# Altium PCB PCB1.PcbDoc
Units mm, origin at the board's own origin, x right, y up, seen from the top; angles counter-clockwise.
Board outline 36 x 36 mm, 2 copper layers (Top Layer, Bottom Layer); 19 components, 84 nets, 192 pads, 9 vias.
Unrouted connection lines stored in the file: 73.
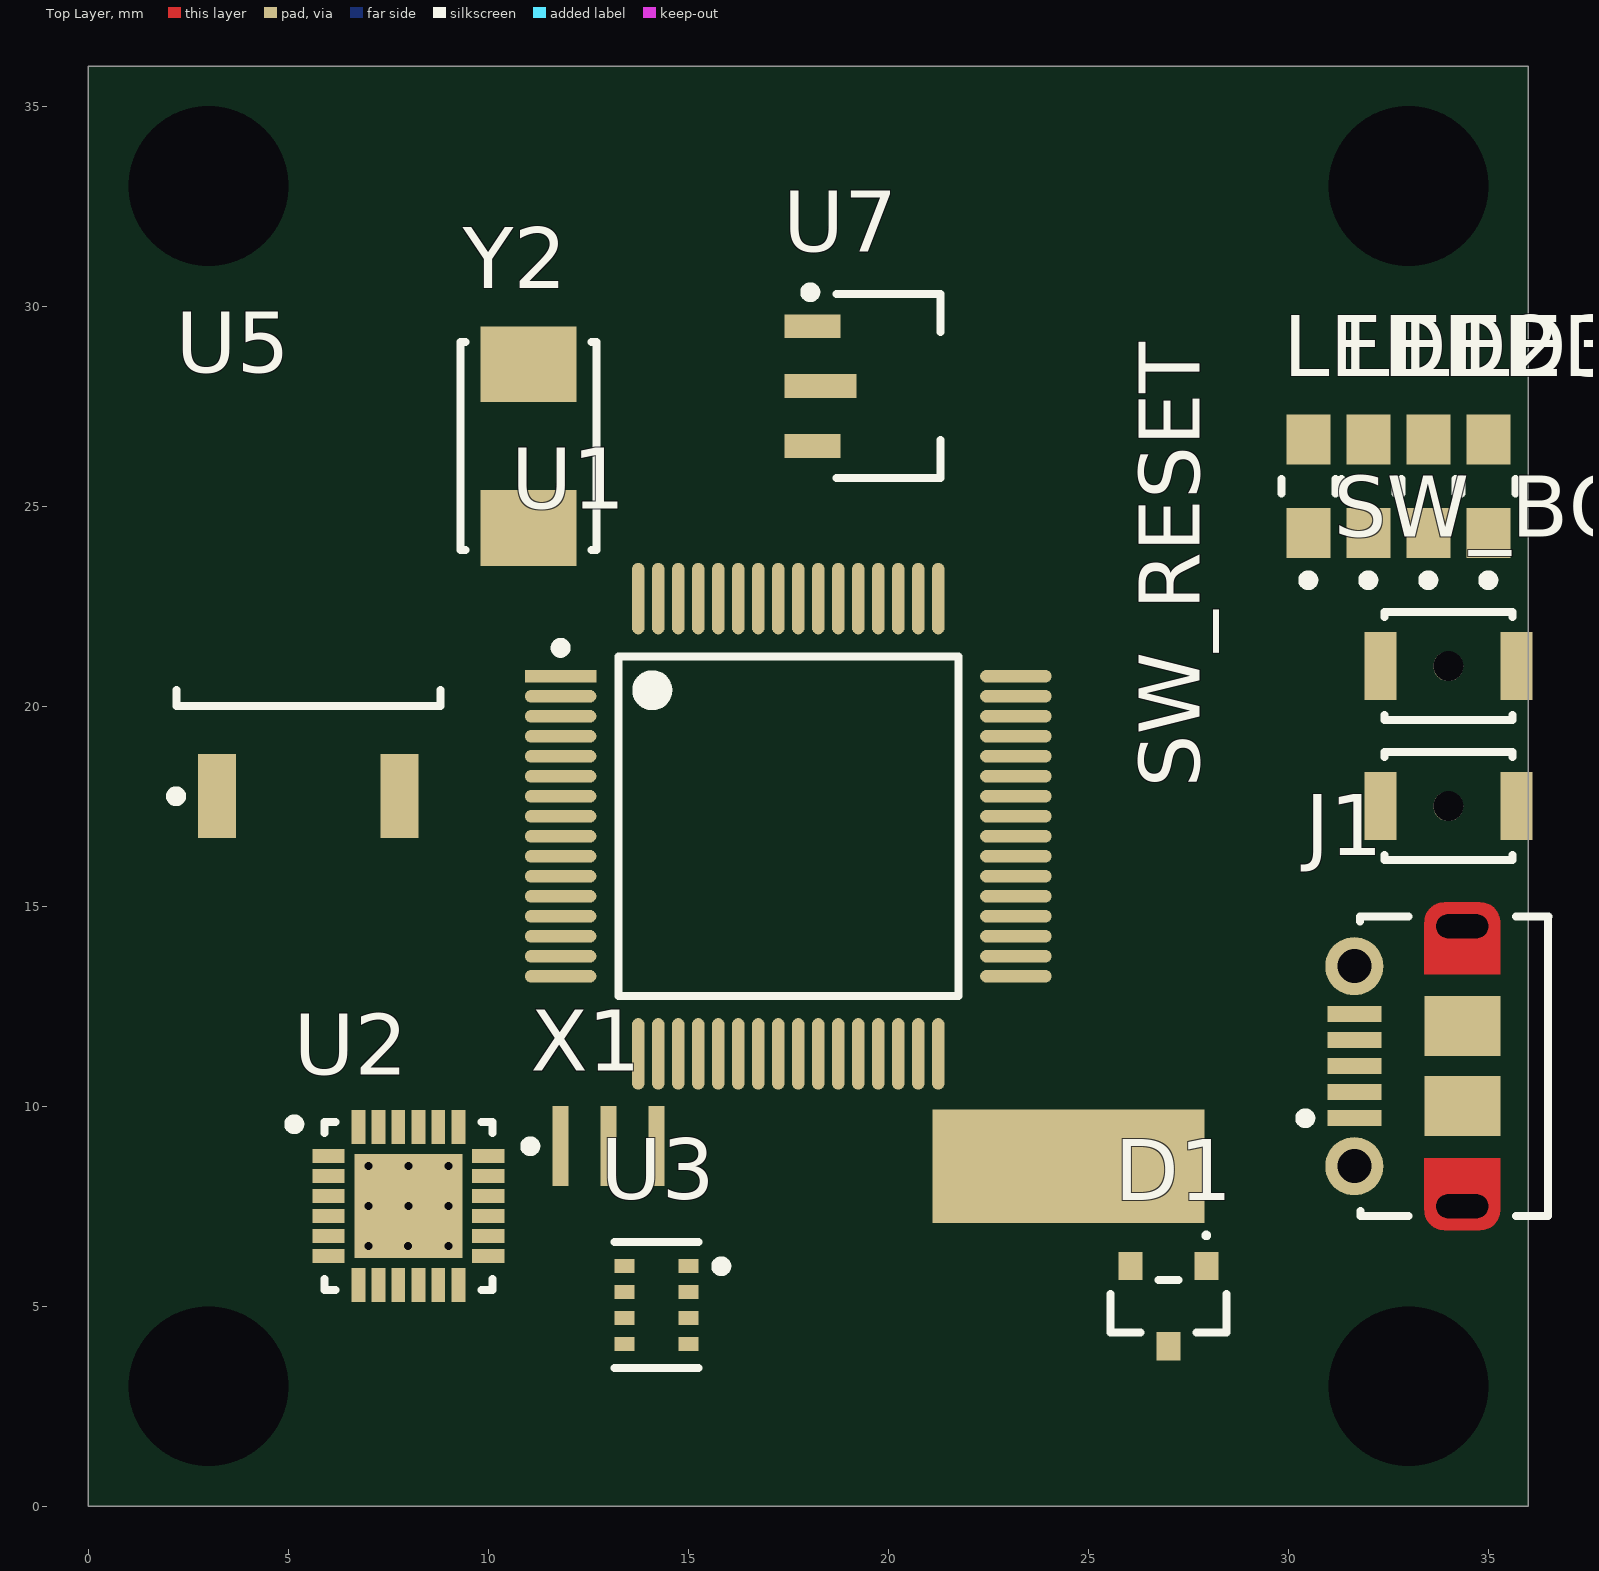
[diagram p0: Top Layer view]
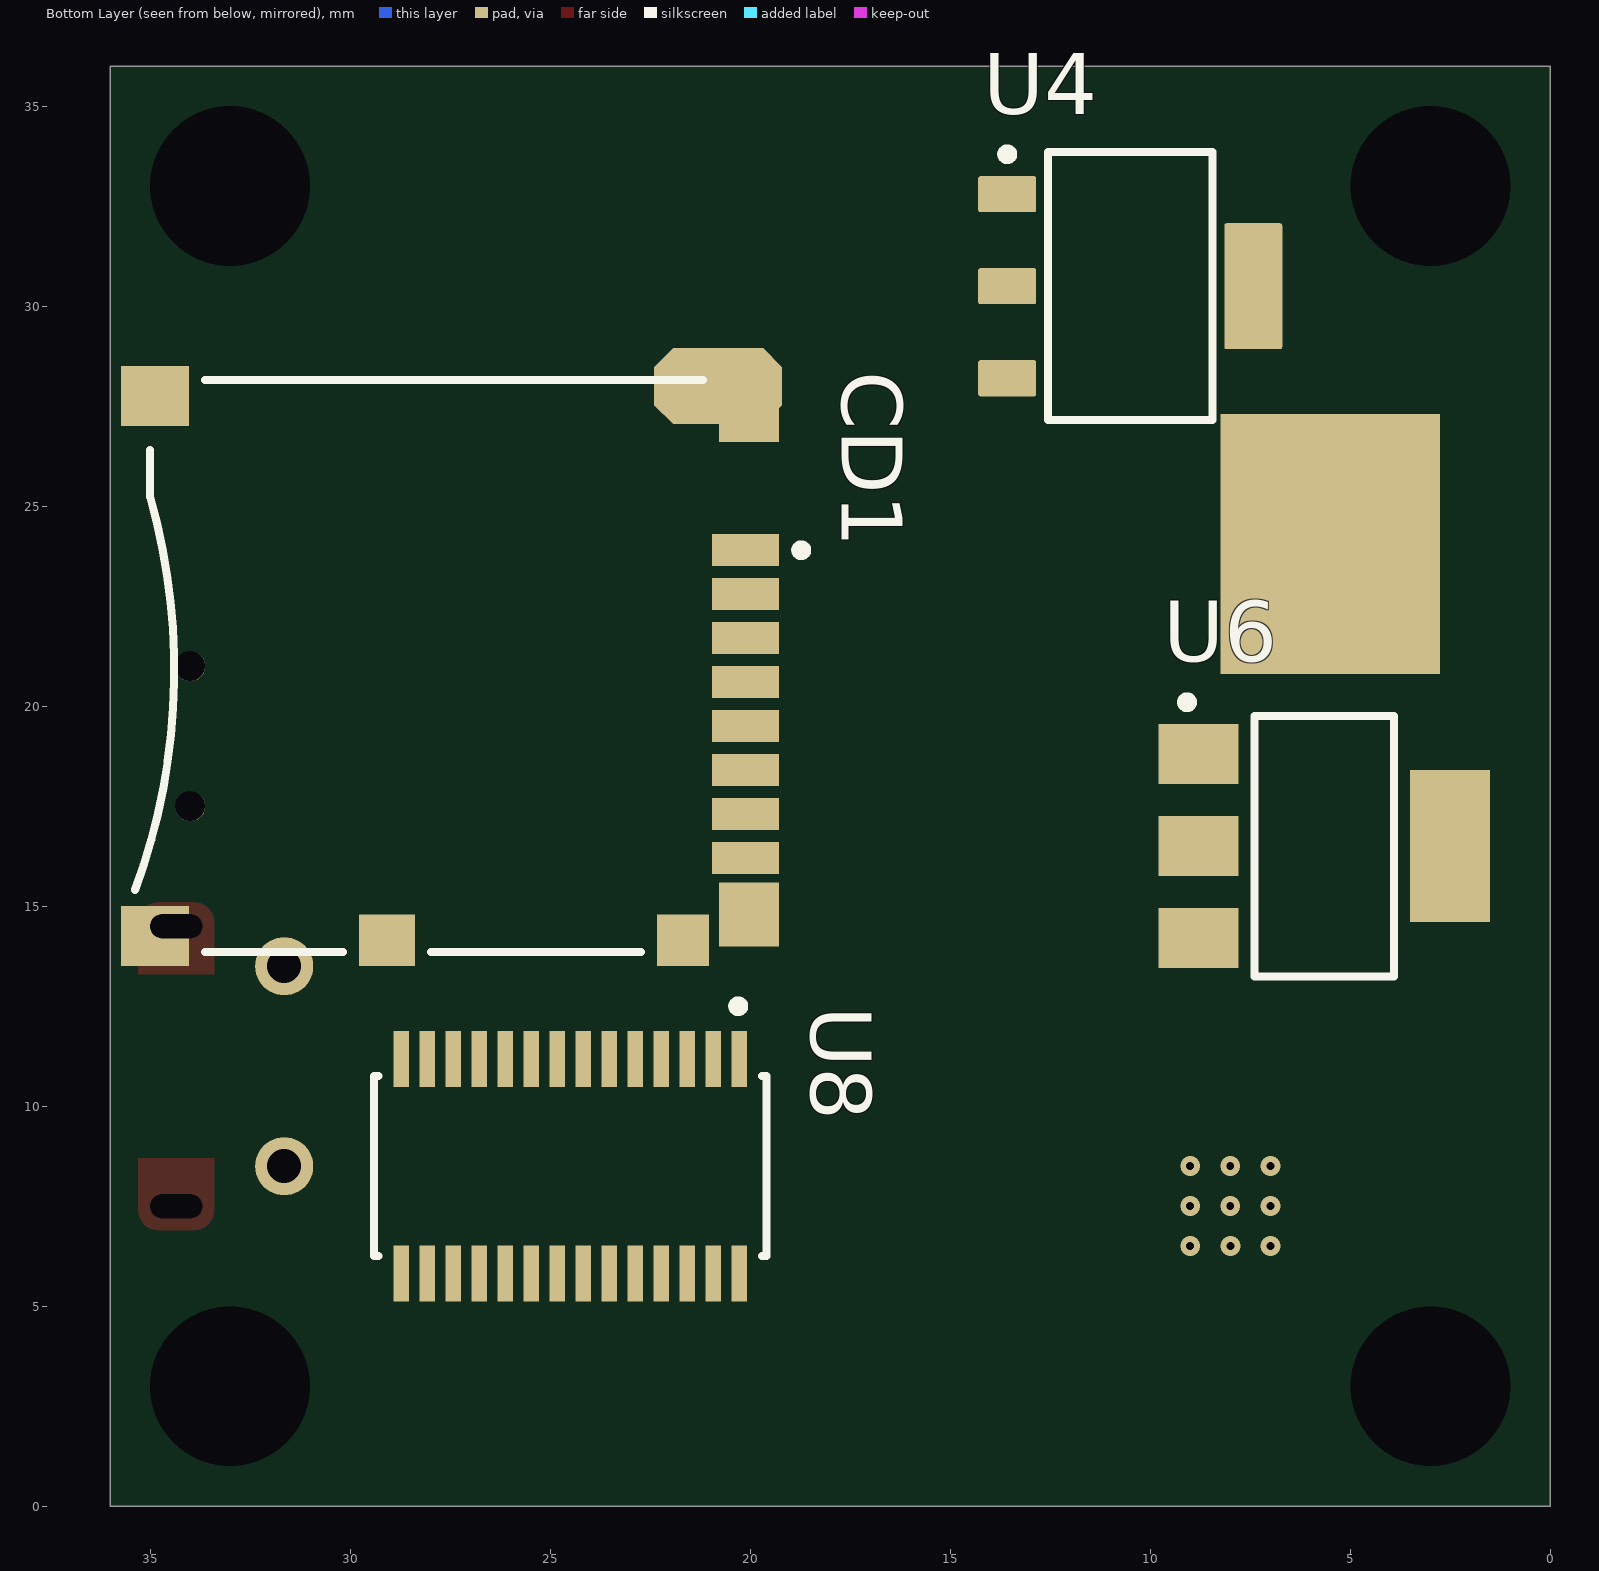
[diagram p1: Bottom Layer view, seen from below]

## Layer stack, top to bottom
Top Solder: solder mask 0.0102, Solder Resist, Dk 3.5
Top Layer: signal copper 0.0356
Dielectric 1: dielectric 0.32, FR-4, Dk 4.8
Bottom Layer: signal copper 0.0356
Bottom Solder: solder mask 0.0102, Solder Resist, Dk 3.5

## Board outline
0,0 36,0 36,36 0,36

## Design rules (kind name [scope] priority, off if disabled: settings)
Clearance [All] p1: gap=0.254 ignorepadtopadclearanceinfootprint=FALSE except(0: Arc-Hole Track-Hole SMDPad-Hole THPad-Hole Via-Hole Fill-Hole Poly-Hole Region-Hole Text-Hole)
PolygonConnect [All] p1: connectstyle=Relief reliefconductorwidth=0.254 reliefentries=4 polygonreliefangle="90 Angle" airgapwidth=0.254
RoutingVias [All] p1: holewidth=0.711 width=1.27 viastyle="Through Hole" minholewidth=0.711 minwidth=1.27 maxholewidth=0.711 maxwidth=1.27
SolderMaskExpansion [All] p1: expansion=0.102 istentingtop=FALSE
Width [All] p1: maxlimit=0.254 minlimit=0.254 preferedwidth=0.254
30 further rules are at their usual default settings.

## Components (designator, comment, footprint, x,y, rotation, side; value= is the part's Value field where it differs from the comment)
CD1 "502774-0891" MOLX-502774-0891_V 27.5,21 r270 bottom
D1 "BAT54C" NXP-SOT23-3_V 27,5 r0 top
J1 "105017-0001" USB-MICRO-B_V 33,11 r90 top
LED1 "SML-210MTT86" FP-SML-210-MFG 30.5,25.5 r90 top
LED2 "SML-210MTT86" FP-SML-210-MFG 32,25.5 r90 top
LED3 "SML-210MTT86" FP-SML-210-MFG 33.5,25.5 r90 top
LED4 "SML-210MTT86" FP-SML-210-MFG 35,25.5 r90 top
SW_BOOT "B3U-1000P-B" FP-B3U-1000P-B-MFG 34,17.5 r0 top
SW_RESET "B3U-1000P-B" FP-B3U-1000P-B-MFG 34,21 r180 top
U1 "STM32F722RET6" FP-LQFP64-5W-IPC_A 17.5,17 r0 top
U2 "MPU-6000" INSE-QFN-24_V 8,7.5 r0 top
U3 "BMP280" FP-BMP280-MFG 14.2,5.025 r0 top
U4 "LM2940IMP-9.0/NOPB" DCY0004A_L 10.5,30.5 r180 bottom
U5 "LD1117DT50TR" TO-252_N 5.5,22 r90 top
U6 "NCP1117ST33T3G" ONSC-SOT-223-4-318H-01_A_V 5.65,16.5 r180 bottom
U7 "L78L05ABUTR" SOT-89_N 20,28 r0 top
U8 "MAX7456EUI+T" FP-U28E-5-MFG 24.5,8.5 r270 bottom
X1 "CSTCE8M00G55-R0" MURA-CSTCE_G_A-3_V 13,9 r0 top
Y2 "ABM3-27.000MHZ-D2Y-T" FP-ABM3-MFG 11,26.5 r90 top

## Footprints (in the part's own frame and the unit in brackets; to place one, negate y for a bottom-side part, rotate by r counter-clockwise, add the part's x,y. Pads: shape width x height; smd on the part's side, far side on the other; paste and mask are expansions set on the pad)
DCY0004A_L [mm] "SOT223, 4-Leads, Body 6.7x3.7mm, Pitch 2.3mm, IPC High Density"
  rrect11% 1.45x0.9 smd: 1(-3.075,2.3) 2(-3.075,0) 3(-3.075,-2.3)
  rrect7% 1.45x3.15 smd: 4(3.075,0)
  silkscreen extent -3.2,-3.35 2.05,3.42, body extent -3.5,-3.25 3.5,3.25, height 1.62
FP-ABM3-MFG [mm]
  rect 1.9x2.4 smd paste+0 mask+0: 1(-2.05,0) 2(2.05,0)
  silkscreen extent -2.6,-1.7 2.6,1.7, body extent -3.1,-1.8 3.1,1.8, height 0.25
FP-B3U-1000P-B-MFG [mm]
  rect 0.8x1.7 smd paste+0 mask+0: 1(-1.7,0) 2(1.7,0)
  round 0.75 hole 0.75 unplated paste-1000 mask+0: ""(0,0)
  silkscreen extent -1.6,-1.35 1.6,1.35, body extent -2.2,-1.45 2.2,1.45, height 0.25
FP-BMP280-MFG [mm]
  rect 0.5x0.35 smd paste+0 mask+0: 1(0.8,0.975) 2(0.8,0.325) 3(0.8,-0.325) 4(0.8,-0.975) 5(-0.8,-0.975) 6(-0.8,-0.325) 7(-0.8,0.325) 8(-0.8,0.975)
  silkscreen extent -1.05,-1.58 1.75,1.58, body extent -1.55,-1.8 1.55,1.8, height 0.25
FP-LQFP64-5W-IPC_A [mm]
  rect 1.788x0.312 smd paste+0 mask+0: 1(-5.691,3.75)
  rrect100% 1.788x0.312 smd paste+0 mask+0: 2(-5.691,3.25) 3(-5.691,2.75) 4(-5.691,2.25) 5(-5.691,1.75) 6(-5.691,1.25) 7(-5.691,0.75) 8(-5.691,0.25) 9(-5.691,-0.25) 10(-5.691,-0.75) 11(-5.691,-1.25) 12(-5.691,-1.75) 13(-5.691,-2.25) 14(-5.691,-2.75) 15(-5.691,-3.25) 16(-5.691,-3.75) 33(5.691,-3.75) 34(5.691,-3.25) 35(5.691,-2.75) 36(5.691,-2.25) 37(5.691,-1.75) 38(5.691,-1.25) 39(5.691,-0.75) 40(5.691,-0.25) 41(5.691,0.25) 42(5.691,0.75) 43(5.691,1.25) 44(5.691,1.75) 45(5.691,2.25) 46(5.691,2.75) 47(5.691,3.25) 48(5.691,3.75)
  rrect100% 0.312x1.788 smd paste+0 mask+0: 17(-3.75,-5.691) 18(-3.25,-5.691) 19(-2.75,-5.691) 20(-2.25,-5.691) 21(-1.75,-5.691) 22(-1.25,-5.691) 23(-0.75,-5.691) 24(-0.25,-5.691) 25(0.25,-5.691) 26(0.75,-5.691) 27(1.25,-5.691) 28(1.75,-5.691) 29(2.25,-5.691) 30(2.75,-5.691) 31(3.25,-5.691) 32(3.75,-5.691) 49(3.75,5.691) 50(3.25,5.691) 51(2.75,5.691) 52(2.25,5.691) 53(1.75,5.691) 54(1.25,5.691) 55(0.75,5.691) 56(0.25,5.691) 57(-0.25,5.691) 58(-0.75,5.691) 59(-1.25,5.691) 60(-1.75,5.691) 61(-2.25,5.691) 62(-2.75,5.691) 63(-3.25,5.691) 64(-3.75,5.691)
  silkscreen extent -5.82,-4.25 4.25,4.58, body extent -7.09,-7.09 7.09,7.09, height 0.25
FP-SML-210-MFG [mm]
  rect 1.25x1.1 smd paste+0 mask+0: 1(-1.175,0) 2(1.175,0)
  silkscreen extent -2.47,-0.67 0.18,0.67, body extent -1.9,-0.77 1.9,0.77, height 0.25
FP-U28E-5-MFG [mm]
  rect 1.4x0.38 smd paste+0 mask+0: 1(-2.68,4.225) 2(-2.68,3.575) 3(-2.68,2.925) 4(-2.68,2.275) 5(-2.68,1.625) 6(-2.68,0.975) 7(-2.68,0.325) 8(-2.68,-0.325) 9(-2.68,-0.975) 10(-2.68,-1.625) 11(-2.68,-2.275) 12(-2.68,-2.925) 13(-2.68,-3.575) 14(-2.68,-4.225) 15(2.68,-4.225) 16(2.68,-3.575) 17(2.68,-2.925) 18(2.68,-2.275) 19(2.68,-1.625) 20(2.68,-0.975) 21(2.68,-0.325) 22(2.68,0.325) 23(2.68,0.975) 24(2.68,1.625) 25(2.68,2.275) 26(2.68,2.925) 27(2.68,3.575) 28(2.68,4.225)
  rect 2.84x6.8 smd far side paste+0 mask+0: 29(0,0)
  silkscreen extent -4.12,-4.9 2.25,4.9, body extent -3.2,-4.85 3.2,4.85, height 1.1
INSE-QFN-24_V [mm] "QFN, 24-Leads, Body 4.00x4.00mm, Pitch 0.50mm, Thermal Pad 2.7x2.6mm"
  rect 0.8x0.35 smd: 1(-2,1.25) 2(-2,0.75) 3(-2,0.25) 4(-2,-0.25) 5(-2,-0.75) 6(-2,-1.25) 13(2,-1.25) 14(2,-0.75) 15(2,-0.25) 16(2,0.25) 17(2,0.75) 18(2,1.25)
  rect 0.35x0.85 smd: 7(-1.25,-1.975) 8(-0.75,-1.975) 9(-0.25,-1.975) 10(0.25,-1.975) 11(0.75,-1.975) 12(1.25,-1.975) 19(1.25,1.975) 20(0.75,1.975) 21(0.25,1.975) 22(-0.25,1.975) 23(-0.75,1.975) 24(-1.25,1.975)
  rect 2.7x2.6 smd: 25(0,0)
  silkscreen extent -2.97,-2.1 2.1,2.17, body extent -2,-2 2,2, height 0.95
MOLX-502774-0891_V [mm] "SMD, 14-Leads, Body 15x14.3mm, Pitch 1.1mm"
  rect 0.8x1.68 smd: 1(-2.9,7.385) 2(-1.8,7.385) 3(-0.7,7.385) 4(0.4,7.385) 5(1.5,7.385) 6(2.6,7.385) 7(3.7,7.385) 8(4.8,7.385)
  rect 1.29x1.3 smd: 9(6.855,5.825)
  rect 1.29x1.4 smd: 10(6.855,-1.575)
  rect 1.5x1.7 smd: 11(6.75,-7.375) 12(-6.75,-7.375)
  rect 1.7x1.5 smd: 13(-6.45,7.475)
  rect 1.6x1.5 smd: 14(6.21,7.475)
  silkscreen extent -7.15,-7.88 7.15,8.9, body extent -7.15,-8 7.15,8, height 1.78
MURA-CSTCE_G_A-3_V [mm] "SMD, 3-Leads, Body 3.2x1.3mm, Pitch 1.2mm"
  rect 0.4x2 smd: 1(-1.2,0) 2(0,0) 3(1.2,0)
  silkscreen extent -2.07,-0.12 -1.83,0.12, body extent -1.6,-0.65 1.6,0.65, height 0.7
NXP-SOT23-3_V [mm] "SOT23, 3-Leads, Body 1.3x2.9mm, Pitch 0.95mm"
  rect 0.6x0.7 smd paste-0.05: 1(0.95,1) 2(-0.95,1) 3(0,-1)
  silkscreen extent -1.45,-0.65 1.45,1.79, body extent -1.45,-0.65 1.45,0.65, height 1.1
ONSC-SOT-223-4-318H-01_A_V [mm] "SOT223, 4-Leads, Body 6.5x3.5mm, Pitch 2.3mm"
  rect 2x1.5 smd: 1(-3.15,2.3) 2(-3.15,0) 3(-3.15,-2.3)
  rect 2x3.8 smd: 4(3.15,0)
  silkscreen extent -3.55,-3.25 1.75,3.72, body extent -1.75,-3.25 1.75,3.25, height 1.8
SOT-89_N [mm] "SOT89, 3-Leads, Body 4.5x2.4 mm, Pitch 1.5mm, Lead Span 4.1mm, IPC Medium Density"
  rect 1.4x0.6 smd: 1(-1.9,1.5) 3(-1.9,-1.5)
  rect 1.8x0.6 smd: 2(-1.7,0)
  oct 3.2x1.9 smd far side: 2(0.8,0)
  silkscreen extent -2.07,-2.3 1.3,2.47, body extent -1.3,-2.3 1.3,2.3, height 1.6
TO-252_N [mm] "D-PAK, 4-Leads, Body 6.1x6.5mm, Pitch 2.28mm, Lead Span 9.7mm, IPC Medium Density"
  rect 2.1x0.95 smd: 1(-4.25,2.28) 3(-4.25,-2.28)
  rect 6.5x5.5 smd far side: 4(2.05,0)
  silkscreen extent -4.37,-3.3 -1.6,3.43, body extent -2,-3.3 4.2,3.3, height 2.4
USB-MICRO-B_V [mm] "USB, MICRO B, Body 7.491x4.695 mm, Pitch 0.65 mm"
  rect 0.4x1.35 smd: 1(-1.3,1.35) 2(-0.65,1.35) 3(0,1.35) 4(0.65,1.35) 5(1.3,1.35)
  round 1.45 hole 0.85: 6(-2.5,1.35) 7(2.5,1.35)
  rrect50% 0x0 hole 0.6 slot 1.3 at 90 deg: 8(-3.5,-1.35) 11(3.5,-1.35)
  rect 1.5x1.9 smd: 9(-1,-1.35) 10(1,-1.35)
  Top Layer circle w0.5: c-3.6,-1.8 r0.25
  Top Layer circle w0.5: c-3.6,-0.9 r0.25
  Top Layer circle w0.5: c3.6,-1.8 r0.25
  Top Layer circle w0.5: c3.6,-0.9 r0.25
  Top Layer region: -3.6,-1.8 -3.6,-0.9 -4.1,-0.9 -4.1,-1.8
  Top Layer region: 3.6,-0.9 3.6,-1.8 4.1,-1.8 4.1,-0.9
  Top Layer region: 2.3,-0.4 2.3,-2.3 3.6,-2.3 3.6,-0.4
  Top Layer region: -2.3,-2.3 -2.3,-0.4 -3.6,-0.4 -3.6,-2.3
  silkscreen extent -3.75,-3.5 3.75,2.7, body extent -4.1,-3.9 4.1,1.5, height 2.67

## Part data
CD1: library part CMP-2000-05248-1, "Micro SD Memory Card Connector, 0.5 A, 10 V (DC), -25 to 85 degC, 8-Pin SMT, RoHS, Tape and Reel", Manufacturer=Molex, Standard Package=1, 3D Model=502774-0891.stp, Card Type=SecureDigital-microSD™, Catalog Drawings=502774-0891, Category=Connectors,Interconnects, Connector Type=ConnectorandEjector, Contact Finish=Gold, Contact Finish Thickness=20µin(0.51µm), Datasheet URL=https://datasheet.ciiva.com/1104/1499551-1104671.pdf, Datasheet Version="Rev. D, 04/2004", Ejector Side=-, Family=MemoryConnectors-PCCardSockets, Features=Switch, Height Above Board="0.071\"(1.80mm)", Insertion, Removal Method=PushIn,PushOut, Manufacturer URL=http://www.molex.com/, Mounting Feature=Reverse-Bottom, Mounting Type=SurfaceMount,RightAngle, Number of Positions=10(8+2), Online Catalog=microSD™Series, Other Names=WM24066DKR, Packaging=Digi-Reel, RoHS Information=502774-0891CertofCompliance, Series=502774
D1: library part CMP-0417-00003-1, "Schottky Barrier Diode, 30 V, 2 uA, -55 to 150 degC, 3-Pin SOT23, RoHS, Tape and Reel", Manufacturer="NXP Semiconductors", Temperature Range="-55 to 150 degC", Cd (pF)=10, ComponentLink1Description="Manufacturer URL", ComponentLink1URL=http://www.nxp.com/, ComponentLink2Description=Datasheet, ComponentLink2URL=http://www.nxp.com/documents/data_sheet/BAT54_SER.pdf, DatasheetVersion="Rev. 5", IR (uA)=2, Mounting Technology="Surface Mount", PackageDescription="3-Pin Plastic Surface-mounted Package, Body 1.3 x 2.9 mm, Pitch 0.95 mm", PackageReference=SOT23-3, Packing="Tape and Reel", PartNumber=BAT54C, RoHS=TRUE, Rth(j-a) (K/W)=500, Trr (ns)=5, VF (mV)=800, VR (V)=30
J1: library part CMP-2000-05827-1, "Micro-USB B Receptacle, Right Angle, Bottom Mount, Surface Mount, with Solder Tabs, -30 to 85 degC, 5-Pin USB, RoHS, Tape and Reel", Manufacturer=Molex, Package Description="5-Leads USB, Micro B, Body 7.5 x 5 mm, Pitch 0.65 mm", Package Reference=MICRO-B, Package Version="Rev. F, 12/2012", Standard Package=1, Voltage - Max=30V, 3D Model=105017-0001.stp, Catalog Drawings=1050170001, Category=Connectors,Interconnects, Circuits=5, Connector Type=USB-microB, Datasheet URL=http://www.molex.com/elqNow/elqRedir.htm?ref=http://www.molex.com/webdocs/datasheets/pdf/en-us/1050170001_IO_CONNECTORS.pdf, Datasheet Version=03/2016, Family=USB,DVI,HDMIConnectors, Featured Product=Micro-USBConnectorsUSBConnectors, Features=Shielded,SolderRetention, Gender=Receptacle, Ingress Protection=-, Manufacturer URL=http://www.molex.com/, Mating Products=WM17145-ND-CABLEMICROUSBBTOSTDA1.0MWM17147-ND-CABLEMICROUSBBTOSTDA2.0MWM17146-ND-CABLEMICROUSBBTOSTDA1.5M, Mounting Technology=SurfaceMount, Mounting Type=BoardCutout,SurfaceMount,RightAngle, Number of Contacts=5, Online Catalog=Molex-MicroUSB, Other Names=WM1399DKR, Package URL=http://www.molex.com/pdm_docs/sd/1050170001_sd.pdf, Packaging=Digi-Reel®, PCN Assembly/Origin=ResinSupplier21/Oct/2015, RoHS Information=1050170001CertofCompliance, Series=-, Specifications=-
LED1 LED2 LED3 LED4: library part CMP-08952-000013-1, "LED GREEN CLEAR 0805 SMD", Colour=Green, Forward Current=20mA, Forward Voltage=2.2V, Manufacturer=ROHM, Package=SML-210, Power Dissipation=70mW, Reverse Voltage=4V, Temperature="-30°C to +85°C", Temperature Range High=+85°C, Temperature Range Low=-30°C, Automotive=No, Category=Diode, ComponentLink2Description=Datasheet, ComponentLink2URL=https://www.mouser.in/ds/2/348/sml-21-313092.pdf, Device Class L1=Optoelectronics, Device Class L2=LEDs, Device Class L3=unset, Digikey Description="LED GREEN CLEAR 0805 SMD", Height=0.90mm, Ipc Land Pattern Name=DIOCP200125X25, Lead Free=Yes, Led Orientation="Top View", Luminous Intensity=16mcd, Manufacturer Part Number=SML-210MTT86, Mouser Description="Standard LEDs - SMD GREEN SMD TRANS LENS", Octopart=https://octopart.com/sml-210mtt86-rohm-550711, Peak Emmision Wavelength=573nm, RoHS=TRUE, Wavelength=570nm
SW_BOOT SW_RESET: library part CMP-08834-000005-1, "SWITCH TACTILE SPST-NO 0.05A 12V", Ambient Temperature Range High=+70°C, Ambient Temperature Range Low=-25°C, Contact Current Rating=50mA, Contact Resistance=100mΩ, Manufacturer=Omron, Operating Force=1.5N, Package=0, Temperature="-25°C to +70°C", Voltage Rating Dc=12V, Automotive=No, Category=Switch, ComponentLink2Description=Datasheet, ComponentLink2URL=https://omronfs.omron.com/en_US/ecb/products/pdf/en-b3u.pdf, Device Class L1=Electromechanical, Device Class L2=Switches, Device Class L3="Tactile Switches", Digikey Description="SWITCH TACTILE SPST-NO 0.05A 12V", Electromechanical Life=200000Cycles, Height=1.75mm, Lead Free=Yes, Manufacturer Part Number=B3U-1000P-B, Mount="Surface Mount", Mouser Description="Tactile Switches Top Actuated with boss w/o ground", Octopart=https://octopart.com/b3u-1000p-b-omron-1057356, RoHS=TRUE, Temperature Range High=+70°C, Temperature Range Low=-25°C, Throw Configuration=SPST-NO
U1: library part CMP-12105-000139-1, "IC MCU 32BIT 512KB FLASH 64LQFP", Case/Package=LQFP, Frequency=216MHz, Max Operating Temperature=85°C, Min Operating Temperature=-40°C, Core Architecture=ARM, Interface=I2C, Memory Size=512KB, Memory Type=FLASH, Mount="Surface Mount", Number of I/Os=50, Oscillator Type=Internal, Packaging=Tray, Peripherals="Brown-out Detect/Reset"
U2: library part CMP-2000-05008-1, "3-Axis Gyroscope 3-Axis Accelerometer Motion Processing Unit with I2C and SPI, 2.5, 3 or 3.3 V, -40 to 85 degC, 24-Pin QFN, RoHS, Tape and Reel", Manufacturer=InvenSense, Operating Temperature=-40degC~85degC(TA), Package Description="24-Pin Quad Flat No-lead Package, Body 4 x 4 mm, Pitch 0.5 mm", Package Reference=QFN-24, Standard Package=5,000, Category=Sensors,Transducers, Datasheet URL=https://www.invensense.com/wp-content/uploads/2015/02/MPU-6000-Datasheet1.pdf, Datasheet Version="Rev. 3.4, 08/2013", Family=Multifunction, Featured Product=MPU60006AxisIntegratedSPISolution, Manufacturer URL=http://www.invensense.com/, Online Catalog=MPU-6000™Series, Other Names="1428-1005-2 / MPU6000", Output Type=I²C,SPI, Sensor Type=Accelerometer,Gyroscope,3Axis
U3: library part CMP-2000-05076-3, "SENSOR PRESSURE ABS", Case/Package=SMD/SMT, Max Operating Temperature=85°C, Min Operating Temperature=-40°C, Operating Pressure=15.95PSI, Lead Free="Lead Free", Max Pressure=290.08PSI, Number of Pins=8, Output Type=SPI, Port Style="No Port", Pressure Type=Absolute, Termination=SMD/SMT
U4: library part CMP-0062-01727-3, "1A Low Dropout Regulator, 4-pin SOT-223, Pb-Free", Manufacturer="Texas Instruments", PackageTopMarking=XYTT*L0EB, PowerWise=N, Code_IPC=SOT223-4, Code_JEDEC=TO-261-AA, ComponentLink1Description="Datasheet URL", ComponentLink1URL=http://www.ti.com/general/docs/lit/getliterature.tsp?genericPartNumber=LM2940-N&fileType=pdf, CompType="LDO IC", PackageDescription="Molded SOT-223, 6.50 x 3.56 x 1.6mm Body, 4 Lead, 2.3mm Pitch", PackageReference=DCY0004A, PinCount=4, RoHS=Y
U5: library part CMP-0244-00108-1, "Fixed Low Drop Positive Voltage Regulator, 5V, 3-Pin DPAK, Tape and Reel", ComponentLink1Description="Manufacturer URL", ComponentLink1URL=http://www.st.com, ComponentLink2Description=Datasheet, ComponentLink2URL=http://www.st.com/internet/com/TECHNICAL_RESOURCES/TECHNICAL_LITERATURE/DATASHEET/CD00000544.pdf, DatasheetVersion=1/11/2011, PackageDescription="3-Pin Transistor Outline Package 2.28 mm Pitch, 9.7 mm Lead Span (DPAK)", PackageReference=TO-252, PackageVersion=2011
U6: library part CMP-1679-00010-1, "Low-Dropout Positive Fixed Voltage Regulator, 1 A, 3.3 V Output Voltage, 0 to 125 degC, 4-Pin SOT-223 (318H-01), Pb-Free, Tape and Reel", Case Code (Imperial)=0603, Case Code (Metric)=1608, Max Operating Temperature="155 degC", Min Operating Temperature="-55 degC", Package Quantity=5000, Power Rating="100 mW", Resistance="220 kohm", Tolerance=1%, Type (Resistor)="Thick Film", Voltage Rating="75 V", Case\Package=0603, ComponentLink1Description="Manufacturer URL", ComponentLink1URL=http://www.onsemi.com/, ComponentLink2Description=Datasheet, ComponentLink2URL=http://www.onsemi.com/pub_link/Collateral/NCP1117-D.PDF, DatasheetVersion="Rev. 27, 09/2014", Height="0.45 mm", Length="1.55 mm", Mount="Surface Mount", PackageDescription="4-Pin Small Outline Transistor, Body 6.5 x 3.5 mm, Pitch 2.3 mm", PackageReference=SOT-223-4-318H-01_A, Packaging="Tape and Reel", Radiation Hardening=No, REACH SVHC=Unknown, RoHSCompliant=true, Weight="7.1E-05 oz", Width="0.85 mm"
U7: library part CMP-0244-00406-1, "Positive Voltage Regulator, 5V, 4-Pin SOT-89, Tape and Reel", ComponentLink1Description="Manufacturer URL", ComponentLink1URL=http://www.st.com, ComponentLink2Description=Datasheet, ComponentLink2URL=http://www.st.com/internet/com/TECHNICAL_RESOURCES/TECHNICAL_LITERATURE/DATASHEET/CD00000446.pdf, DatasheetVersion=1/02/2011, PackageDescription="3-Pin SOT-89 Package 1.5 mm Pitch, 4.1 mm Lead Span", PackageReference=SOT-89, PackageVersion=2011
U8: library part CMP-05676-000004-1, "IC DISPLAY 1CH W/EEPROM 28TSSOP", Manufacturer="Maxim Integrated", Max Junction Temp=+150°C, Max Supply Voltage=5.25V, Min Supply Voltage=4.75V, Nominal Supply Current=24-58mA, Package=U28E-5, Temperature="-40°C to +85°C", Temperature Range High=+85°C, Temperature Range Low=-40°C, Automotive=No, Category=IC, ComponentLink2Description=Datasheet, ComponentLink2URL=https://datasheets.maximintegrated.com/en/ds/MAX7456.pdf, Device Class L1="Integrated Circuits (ICs)", Device Class L2="Interface ICs", Device Class L3=unset, Digikey Description="IC DISPLAY 1CH W/EEPROM 28TSSOP", Footprint Url=https://pdfserv.maximintegrated.com/package_dwgs/21-0108.PDF, Height=1.1mm, Interface=SPI, Ipc Land Pattern Name=SOP65P638X110-28, Lead Free=Yes, Manufacturer Part Number=MAX7456EUI+T, Obsolete Part=true, Octopart=https://octopart.com/max7456eui%2Bt-maxim+integrated-42626431, RoHS=TRUE, Standoff Height=0.05mm
X1: library part CMP-2100-03620-1, "Ceramic Resonator, 8 MHz, +/- 0.5%, -20 to 80 degC, 3-Pin SMD, RoHS, Tape and Reel", Capacitance=33pF, Case/Package=Ceramic, Frequency=8MHz, Frequency Stability=0.2%, Frequency Tolerance=0.5%, Manufacturer=Murata, Max Operating Temperature=80degC, Min Operating Temperature=-20degC, Package Description="3-Pin Surface Mount Device, Body 3.2 x 1.3 mm, Pitch 1.2 mm", Package Quantity=1, Package Reference=CSTCE_G_A-3, Composition=Ceramic, Contact Plating=Gold, Datasheet URL=http://www.murata.com/~/media/webrenewal/support/library/catalog/products/timingdevice/ceralock/p16e.ashx, Datasheet Version=42339.0, Height=0.031inch, Lead Free=LeadFree, Length=0.126inch, Load Capacitance=33pF, Manufacturer URL=http://www.murata.com/, Mount=SurfaceMount, Number of Pins=3, Packaging=TapeandReel, REACH SVHC=NoSVHC, RoHSCompliant=True, Self Resonant Frequency=8MHz, Termination=SMD/SMT, Tolerance=0.5%, Width=0.051inch
Y2: library part CMP-27762-013610-1, "Crystal 27MHz ±20ppm 18pF SMD-2 5mm x 3.2mm", Case/Package=SMD/SMT, ESR (Equivalent Series Resistance)=30R, Frequency=27MHz, Frequency Stability=30ppm, Frequency Tolerance=20ppm, Load Capacitance=18pF, Max Operating Temperature=85°C, Min Operating Temperature=-40°C, Package Quantity=1000, Resistor Type=Ceramic, Depth=3.2mm, Height=0.051inch, Lead Free="Lead Free", Length=5mm, Mount="Surface Mount", Number of Pins=2, Packaging="Tape and Reel", REACH SVHC="No SVHC", RoHS Compliant=Yes, Series=ABM3, Series Resistance=30R, Termination=SMD/SMT, Tolerance=20ppm, Width=0.126inch

## Free pads (board coordinates)
  round 1.524 hole 4: 1(3,3) 2(33,3) 3(33,33) 4(3,33)

## Via types
v1: diameter 0.5, hole 0.2, Top Layer to Bottom Layer, 9 vias

## Nets (pads, with @x,y where several pads share a name; then routed paths per layer and width w, separated by ;. In a path a pad name is that pad's centre, name@x,y a point inside that pad or via, vN(x,y) a via of type N, cw(c..) or ccw(c..) an arc to the next point about the centre after c; other vN are vias at no path point)
5V: CD1.4 D1.1 U5.4
5V_USB: D1.2 J1.1
9V: U4.3 U5.3
27MHZ: U8.5 Y2.1
27MHZ_XFB: U8.6 Y2.2
ADC_CURR: U1.9
ADC_VBAT: U1.10
BEEPER_PIN: U1.2
CAMERA_CONTROL: U1.36
CLKOUT: U8.7
CS-: U8.8 U8.17 U8.18
CS_Neg: U3.2
FLASH_CS: CD1.2 U1.50
GYRO_1_CS: pad.4 SW_BOOT.2 SW_RESET.2 U1.1 U1.13 U1.32 U1.48 U1.64 U2.8 U2.13 U3.8 U6.2
GYRO_1_EXTI: U1.3 U1.24 U2.12
LED0: U1.4
LED_STRIP: U1.41
MAX7456_SPI_CS: U1.33
NetC6_G_2: 
NetC7_1: U2.20
NetC8_1: U2.10
NetC9_2: U1.30
NetC10_1: U8.25
NetC10_2: 
NetC16_VREG_1: 
NetC16_VREG_2: D1.3 U6.3
NetC50_2: U7.1 U8.3 U8.21 U8.24
NetC90_1: U8.26
NetC110_1: U8.22
NetJ1_2: J1.2
NetJ1_3: J1.3
NetLED1_2: LED1.2
NetLED2_2: LED2.2
NetLED3_2: LED3.2
NetLED4_2: LED4.2
NetR2_G_2: U1.20
NetR3_USB_2: U1.45
NetR6_USB_2: U1.44
NetR8_2: SW_RESET.1 U1.7
NetR9_2: SW_BOOT.1 U1.60
NetR30_1: U8.12
NetR50_1: U8.19
NetU1_5: U1.5 X1.1
NetU1_6: U1.6 X1.3
PC0: U1.8
S1: U1.26
S2: U1.25
S3: U1.39
S4: U1.40
S5: U1.49 U1.58
S6: U1.46 U1.59
S7: U1.28
S8: U1.29
SCL: U1.61
SCLK: U8.10
SDA: U1.62
SDIN: U8.9
SDOUT: U8.11
SPI1_SCK: U3.4
SPI1_SCLK: U1.21
SPI1_SDI: U1.22 U3.3
SPI1_SDO: U1.23 U3.5
SPI2_SCK: U1.34 U2.23
SPI2_SDI: U1.35 U2.24
SPI2_SDO: U1.11 U2.9
SPI3_SCK: CD1.5 U1.55
SPI3_SDI: CD1.7 U1.56
SPI3_SDO: CD1.3 U1.57
UART1_RX: U1.43
UART1_TX: U1.42
UART2_RX: U1.17
UART2_TX: U1.16
UART3_RX: U1.52
UART3_TX: U1.51
UART4_RX: U1.15
UART4_TX: U1.14
UART5_RX: U1.54
UART5_TX: U1.53
UART6_RX: U1.38
UART6_TX: U1.37
USB_DETECT: U1.27
VBAT_PAD: U4.1 U7.3
VideoIn: 
VideoOut: CD1.6 CD1.11 CD1.12 CD1.13 CD1.14 J1.5 J1.6 J1.7 J1.8 J1.9 J1.10 J1.11 LED1.1 LED2.1 LED3.1 LED4.1 U1.12 U1.18 U1.31 U1.47 U1.63 U2.1 U2.11 U2.18 U3.1 U3.7 U4.2 U5.1 U6.1 U7.2 U8.4 U8.20 U8.23 X1.2
pads on no net: CD1.1 CD1.8 CD1.9 CD1.10 J1.4 SW_BOOT. SW_RESET. U1.19 U2.2 U2.3 U2.4 U2.5 U2.6 U2.7 U2.14 U2.15 U2.16 U2.17 U2.19 U2.21 U2.22 U2.25 U3.6 U4.4 U6.4 U8.1 U8.2 U8.13 U8.14 U8.15 U8.16 U8.27 U8.28 U8.29
copper on no net:
  other v1: 7,6.5 8,6.5 9,6.5 7,7.5 8,7.5 9,7.5 7,8.5 8,8.5 9,8.5

## Text inside footprints (layer, text, board x,y; h text height)
J1: Mechanical 1 "PCB EDGE" at 35.9,3.8 h0.3 r90